# Altium PCB PCB.PcbDoc
Units mil, origin at the board's own origin, x right, y up, seen from the top; angles counter-clockwise.
Board outline 2490 x 1105 mil, 2 copper layers (Top Layer, Bottom Layer); 21 components, 27 nets, 98 pads, 1 vias.
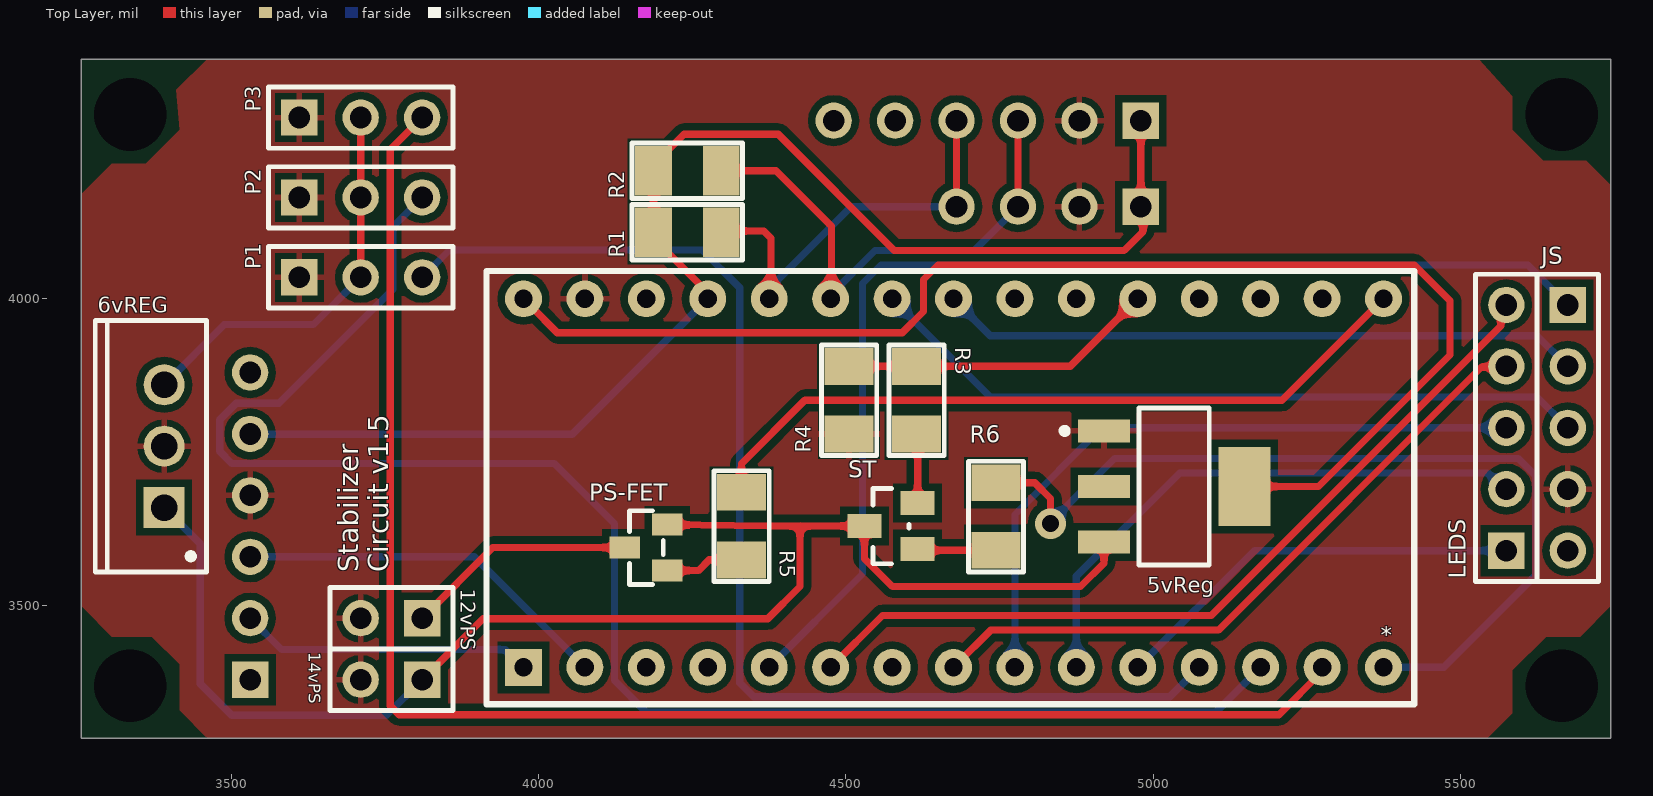
[diagram p0: Top Layer view]
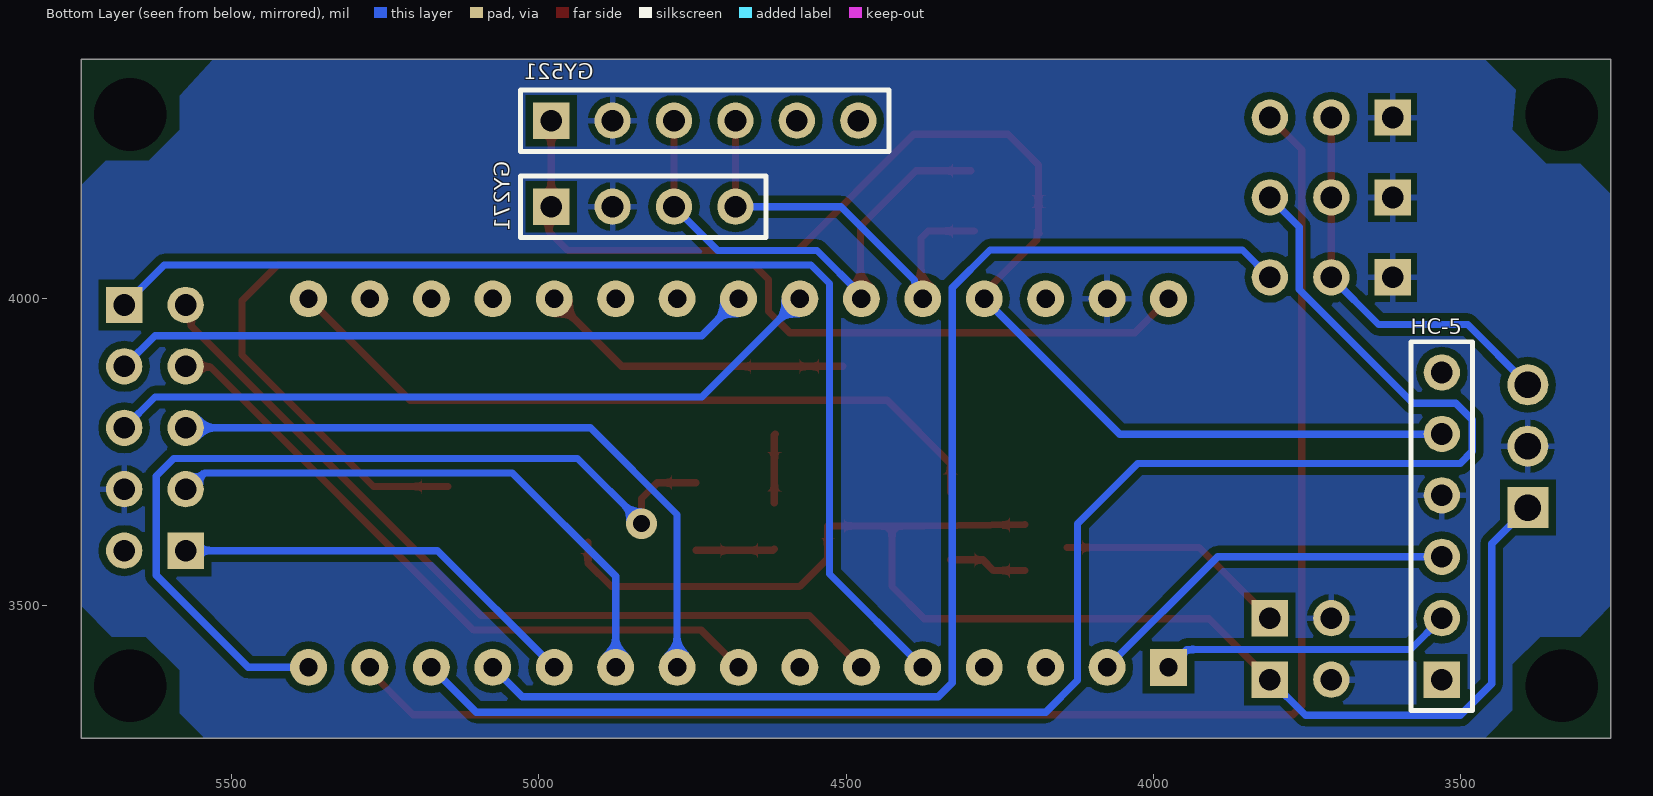
[diagram p1: Bottom Layer view, seen from below]

## Layer stack, top to bottom
Top Solder: solder mask 0.4, Solder Resist, Dk 3.5
Top Layer: signal copper 1.4
Dielectric 1: dielectric 12.6, FR-4, Dk 4.8
Bottom Layer: signal copper 1.4
Bottom Solder: solder mask 0.4, Solder Resist, Dk 3.5

## Board outline
3255,3285 5745,3285 5745,4390 3255,4390

## Design rules (kind name [scope] priority, off if disabled: settings)
Clearance [All] p1: gap=11.81 ignorepadtopadclearanceinfootprint=FALSE
ComponentClearance [All] p1: gap=0 collisioncheckmode=3 verticalgap=0 showdistances=FALSE
Height [All] p1: minheight=0 maxheight=1984.25 prefheight=500
HoleSize [All] p1: absolutevalues=TRUE maxlimit=118.11 minlimit=1 maxpercent=80.000 minpercent=20.000
PolygonConnect [All] p1: connectstyle=Relief reliefconductorwidth=10 reliefentries=4 polygonreliefangle="90 Angle" airgapwidth=10
RoutingVias [All] p1: holewidth=28 width=50 viastyle="Through Hole" minholewidth=28 minwidth=50 maxholewidth=28 maxwidth=50
SilkToSilkClearance [All] p1: silktosilkclearance=0
SilkToSolderMaskClearance [IsPad] p1: minsilkscreentomaskgap=0 clearancetoexposedcopper=TRUE
SolderMaskExpansion [All] p1: expansion=4.92 istentingtop=FALSE
UnRoutedNet [All] p1: checkbadconnections=TRUE
Width [All] p1: maxlimit=31.5 minlimit=11.81 preferedwidth=11.81
24 further rules are at their usual default settings.

## Components (designator, comment, footprint, x,y, rotation, side; value= is the part's Value field where it differs from the comment)
5vReg "LM1117MPX-3.3-NOPB" Texas_Instruments_LM1117MPX-3.3-NOPB_0 5034.17,3694.45 r270 top value=SKIP
6vREG "L7806ABV" TO220 3390,3760 r90 top
12vPS "Header 2" HDR1X2 3810,3480 r180 top
14vPS "Header 2" HDR1X2 3810,3380 r180 top
* "arduinoNano" "ARDUINO NANO" 3815,3340 r0 top
GY271 "Header 4" HDR1X4 4980,4150 r180 bottom
GY521 "Header 6" HDR1X6 4980,4290 r180 bottom
HC-5 "Header 6" HDR1X6 3530,3380 r90 bottom
JS "Header 5" HDR1X5 5675,3990 r270 top
LEDS "Header 5" HDR1X5 5575,3590 r90 top
P1 "Header 3" HDR1X3 3610,4035 r0 top
P2 "Header 3" HDR1X3 3610,4165 r0 top
P3 "Header 3" HDR1X3 3610,4295 r0 top
PS-FET "SI2301BDS-T1-E3" VISHAY_SILICONIX_S-03946_MFG 4175,3595 r180 top
R1 "1.87k" SMD-1206-RES 4241.81,4108.39 r270 top
R2 "1.87k" SMD-1206-RES 4241.81,4208.39 r270 top
R3 "1.62M" SMD-1206-RES 4615,3835 r180 top value=1.62k
R4 "732k" SMD-1206-RES 4505,3835 r0 top
R5 "100" SMD-1206-RES 4330,3630 r0 top
R6 "100" SMD-1206-RES 4744.09,3645.55 r0 top
ST "MMBT5551" ON_Semi_318BM_0 4573.31,3630 r90 top value=SKIP

## Footprints (in the part's own frame and the unit in brackets; to place one, negate y for a bottom-side part, rotate by r counter-clockwise, add the part's x,y. Pads: shape width x height; smd on the part's side, far side on the other; paste and mask are expansions set on the pad)
"ARDUINO NANO" [mil] "arduino nano"
  rect 60x60 hole 30: 0(160,60)
  round 60 hole 30: 1(260,60) 2(360,60) 3(460,60) 4(560,60) 5(660,60) 6(760,60) 7(860,60) 8(960,60) 9(1060,60) 10(1160,60) 11(1260,60) 12(1360,60) 13(1460,60) 14(1560,60) 15(1560,660) 16(1460,660) 17(1360,660) 18(1260,660) 19(1160,660) 20(1060,660) 21(960,660) 22(860,660) 23(760,660) 24(660,660) 25(560,660) 26(460,660) 27(360,660) 28(260,660) 29(160,660)
  silkscreen extent 100,0 1610,705
HDR1X2 [mm] "Connector; Header; 2 Position"
  rect 1.5x1.5 hole 0.9: 1(0,0)
  round 1.5 hole 0.9: 2(2.54,0)
  silkscreen extent -1.27,-1.27 3.81,1.27
HDR1X3 [mm] "Connector; Header; 3 Position"
  rect 1.5x1.5 hole 0.9: 1(0,0)
  round 1.5 hole 0.9: 2(2.54,0) 3(5.08,0)
  silkscreen extent -1.27,-1.27 6.35,1.27
HDR1X4 [mm] "Connector; Header; 4 Position"
  rect 1.5x1.5 hole 0.9: 1(0,0)
  round 1.5 hole 0.9: 2(2.54,0) 3(5.08,0) 4(7.62,0)
  silkscreen extent -1.27,-1.27 8.89,1.27
HDR1X5 [mm] "Connector; Header; 5 Position"
  rect 1.5x1.5 hole 0.9: 1(0,0)
  round 1.5 hole 0.9: 2(2.54,0) 3(5.08,0) 4(7.62,0) 5(10.16,0)
  silkscreen extent -1.27,-1.27 11.43,1.27
HDR1X6 [mm] "Connector; Header; 6 Position"
  rect 1.5x1.5 hole 0.9: 1(0,0)
  round 1.5 hole 0.9: 2(2.54,0) 3(5.08,0) 4(7.62,0) 5(10.16,0) 6(12.7,0)
  silkscreen extent -1.27,-1.27 13.97,1.27
ON_Semi_318BM_0 [mm]
  rect 1x1.4 smd paste+0 mask+0: 1(-0.95,-1.1) 2(0.95,-1.1) 3(0,1.1)
  silkscreen extent -1.56,-0.75 1.56,0.75, body extent -1.66,-1.9 1.66,1.9, height 0.25
SMD-1206-RES [mil]
  rect 80x60 smd: 1(0,55) 2(0,-55)
  silkscreen extent -45,-90 45,90, body extent -34,-66 34,66, height 33
Texas_Instruments_LM1117MPX-3.3-NOPB_0 [mm]
  rect 0.95x2.15 smd paste+0 mask+0: 1(-2.3,-2.9) 2(0,-2.9) 3(2.3,-2.9)
  rect 3.25x2.15 smd paste+0 mask+0: 4(0,2.9)
  silkscreen extent -3.25,-4.65 3.25,1.45, body extent -3.45,-4.08 3.45,4.08, height 0.25
TO220 [mm] "TO, Thru-Hole, Vertical, Heatsink Mounted; 3 In-Line Leads; Pitch 2.54 mm"
  rect 1.7x1.7 hole 1.1: 1(-2.54,0)
  round 1.7 hole 1.1: 2(0,0) 3(2.54,0)
  silkscreen extent -5.2,-1.75 5.2,2.85, body extent -5.25,-1.8 5.25,2.9, height 19.7
VISHAY_SILICONIX_S-03946_MFG [mil]
  rect 50x36 smd paste+0 mask+0: 1(-34,37.5) 2(-34,-37.5) 3(35,0)
  silkscreen extent -28,-60 28,60, body extent -65,-64 65,64, height 10

## Part data
5vReg: library part LM1117MPX-3.3/NOPB, "IC REG LINEAR 3.3V 800MA SOT223", Capacitance=SKIP, Digikey Part Number=LM1117MPX-3.3/NOPBCT-ND, Manufacturer="Texas Instruments", Mouser Part Number=926-LM1117MPX3.3NOPB, Package=SOT-223, Temperature="0°C to +125°C", Temperature Range High=+125°C, Temperature Range Low=0°C, ComponentLink1Description=Upverter, ComponentLink1URL=https://upverter.com/upn/revision/cd27f63952c6b59d/, ComponentLink2Description=Datasheet, ComponentLink2URL=http://www.ti.com/lit/ds/symlink/lm1117.pdf, Datasheet Path=datasheets/IC_Texas_Instruments_LM1117MPX-3.3-NOPB_eec.pdf, Datasheet Path1=datasheets/IC_Texas_Instruments_LM1117MPX-3.3-NOPB_eec.pdf, Digikey Description="IC REG LINEAR 3.3V 800MA SOT223", helpURL=https://upverter.com/upn/revision/cd27f63952c6b59d/, Inductance=SKIP, Lead Free=yes, Library Path1=parts/IC_Texas_Instruments_LM1117MPX-3.3-NOPB_eec.SchLib, Library Ref1=LM1117MPX-3.3-NOPB, Part Number=LM1117MPX-3.3/NOPB, Price=0.703616332073, Resistance=SKIP, RoHS=TRUE, Supplier 1=Digi-Key, Supplier 2=Mouser, Supplier Part Number 1=LM1117MPX-3.3/NOPBCT-ND, Supplier Part Number 2=926-LM1117MPX3.3NOPB, Voltage=SKIP
6vREG: "Positive Voltage Regulator, 6V, 3-Pin TO-220", ComponentLink1Description="Manufacturer URL", ComponentLink1URL=http://www.st.com, ComponentLink2Description=Datasheet, ComponentLink2URL=http://www.st.com/internet/com/TECHNICAL_RESOURCES/TECHNICAL_LITERATURE/DATASHEET/CD00000444.pdf, ComponentLink3Description="Package Specification", ComponentLink3URL=http://www.st.com/internet/com/TECHNICAL_RESOURCES/TECHNICAL_LITERATURE/PACKAGE_INFORMATION/CD00004649.pdf, DatasheetVersion=16/11/2011, PackageDescription="TO, Thru-Hole, Vertical, Heatsink Mounted; 3 In-Line Leads; Pitch 2.54 mm", PackageReference=TO220, PackageVersion=ver3.0, PartNumber=L7806ABV
12vPS 14vPS: "Header, 2-Pin", LatestRevisionDate=17-Jul-2002, LatestRevisionNote="Re-released for DXP Platform.", Publisher="Altium Limited"
GY271: "Header, 4-Pin", LatestRevisionDate=17-Jul-2002, LatestRevisionNote="Re-released for DXP Platform.", Publisher="Altium Limited"
GY521 HC-5: "Header, 6-Pin", LatestRevisionDate=17-Jul-2002, LatestRevisionNote="Re-released for DXP Platform.", Publisher="Altium Limited"
JS LEDS: "Header, 5-Pin", LatestRevisionDate=17-Jul-2002, LatestRevisionNote="Re-released for DXP Platform.", Publisher="Altium Limited"
P1 P2 P3: "Header, 3-Pin", LatestRevisionDate=17-Jul-2002, LatestRevisionNote="Re-released for DXP Platform.", Publisher="Altium Limited"
PS-FET: "TRANS MOSFET P-CH 20V 2.2A SOT23-3", Continuous Drain Current=-2.2A, Digikey Part Number=SI2301BDS-T1-E3CT-ND, Drain To Source Breakdown Voltage=-20V, Drain To Source Resistance=0.08Ω, Gate To Source Voltage=8V, Input Capacitace At Vds="375pF @ -6V", Manufacturer="Vishay Siliconix", Max Forward Diode Voltage=-1.2V, Max Junction Temp=+150°C, Mouser Part Number=781-SI2301BDS-E3, Package=S-03946, Power Dissipation=0.7W, Pulse Drain Current=-10A, Temperature="-55°C to +150°C", Temperature Range Low=-55°C, Typ Forward Diode Voltage=-0.8V, Automotive=No, ComponentLink1Description=Upverter, ComponentLink1URL=https://upverter.com/part/id/8ed443e4ece09bfe/, ComponentLink2Description=Datasheet, ComponentLink2URL=http://www.vishay.com/doc?72066, Datasheet Path=datasheets/Trans_Vishay_Siliconix_SI2301BDS-T1-E3_eec.pdf, Depletion Mode=False, Digikey Description="TRANS MOSFET P-CH 20V 2.2A SOT23-3", Drain To Source Voltage=-20V, Gate Charge At Vgs="4.5nC @ -4.5V", Height=1.12mm, helpURL=https://upverter.com/part/id/8ed443e4ece09bfe/, Ipc Land Pattern Name=SOT95P237X100-3, Lead Free=Yes, Mouser Description="MOSFET 20V 2.0A 0.9W", Number Of Channels=1, Number Of P Channels=1, Part Number=SI2301BDS-T1-E3, RoHS=TRUE, Rthja Max=140°C/W, Standoff Height=0.01mm, Supplier 1=Digi-Key, Supplier 2=Mouser, Supplier Part Number 1=SI2301BDS-T1-E3CT-ND, Supplier Part Number 2=781-SI2301BDS-E3, Temperature Range High=+150°C, Threshold Vgs Max=-0.95V, Threshold Vgs Min=-0.45V, Transconductance=6.5S, Turn Off Delay Time=30ns, Turn On Delay Time=20ns, Verification Version=0.0.0.3
R1 R2: library part ERJ-8ENF1871V, "RES SMD 1.87K OHM 1% 1/4W 1206", Digi-Key Part Number=P1.87KFCT-ND, Manufacturer="Panasonic Electronic Components", Operating Temperature="-55°C ~ 155°C", Package / Case="1206 (3216 Metric)", Power (Watts)="0.25W, 1/4W", Supplier Device Package=1206, Temperature Coefficient=±100ppm/°C, Tolerance=±1%, @ qty=1500, Composition="Thick Film", Datasheets=http://industrial.panasonic.com/www-cgi/jvcr13pz.cgi?E+PZ+3+AOA0002+ERJ8ENF1871V+7+WW, Factory Stock=0, Failure Rate=-, Features="Automotive AEC-Q200", Height - Seated (Max)="0.028\" (0.70mm)", Image=//media.digikey.com/Renders/Panasonic%20Renders/ERJ-1206%20Pkg.jpg, Minimum Quantity=1, Number of Terminations=2, Packaging="Cut Tape (CT)", Part Number=ERJ-8ENF1871V, Part Status=Active, Quantity Available=51643, Series=ERJ, Size / Dimension="0.126\" L x 0.063\" W (3.20mm x 1.60mm)", Unit Price (USD)=0.00933
R3: library part ERJ-8ENF1621V, "RES SMD 1.62K OHM 1% 1/4W 1206", Digi-Key Part Number=P1.62KFCT-ND, Manufacturer="Panasonic Electronic Components", Operating Temperature="-55°C ~ 155°C", Package / Case="1206 (3216 Metric)", Power (Watts)="0.25W, 1/4W", Supplier Device Package=1206, Temperature Coefficient=±100ppm/°C, Tolerance=±1%, @ qty=1500, Composition="Thick Film", Datasheets=http://industrial.panasonic.com/www-cgi/jvcr13pz.cgi?E+PZ+3+AOA0002+ERJ8ENF1621V+7+WW, Factory Stock=0, Failure Rate=-, Features="Automotive AEC-Q200", Height - Seated (Max)="0.028\" (0.70mm)", Image=//media.digikey.com/Renders/Panasonic%20Renders/ERJ-1206%20Pkg.jpg, Minimum Quantity=1, Number of Terminations=2, Packaging="Cut Tape (CT)", Part Number=ERJ-8ENF1621V, Part Status=Active, Quantity Available=55499, Series=ERJ, Size / Dimension="0.126\" L x 0.063\" W (3.20mm x 1.60mm)", Unit Price (USD)=0.00933
R4: library part ERJ-8ENF7323V, "RES SMD 732K OHM 1% 1/4W 1206", Digi-Key Part Number=P732KFCT-ND, Manufacturer="Panasonic Electronic Components", Operating Temperature="-55°C ~ 155°C", Package / Case="1206 (3216 Metric)", Power (Watts)="0.25W, 1/4W", Supplier Device Package=1206, Temperature Coefficient=±100ppm/°C, Tolerance=±1%, @ qty=1500, Composition="Thick Film", Datasheets=http://industrial.panasonic.com/www-cgi/jvcr13pz.cgi?E+PZ+3+AOA0002+ERJ8ENF7323V+7+WW, Factory Stock=0, Failure Rate=-, Features="Automotive AEC-Q200", Height - Seated (Max)="0.028\" (0.70mm)", Image=//media.digikey.com/Renders/Panasonic%20Renders/ERJ-1206%20Pkg.jpg, Minimum Quantity=1, Number of Terminations=2, Packaging="Cut Tape (CT)", Part Number=ERJ-8ENF7323V, Part Status=Active, Quantity Available=40849, Series=ERJ, Size / Dimension="0.126\" L x 0.063\" W (3.20mm x 1.60mm)", Unit Price (USD)=0.00933
R5 R6: library part ERJ-8ENF1000V, "RES SMD 100 OHM 1% 1/4W 1206", Digi-Key Part Number=P100FCT-ND, Manufacturer="Panasonic Electronic Components", Operating Temperature="-55°C ~ 155°C", Package / Case="1206 (3216 Metric)", Power (Watts)="0.25W, 1/4W", Supplier Device Package=1206, Temperature Coefficient=±100ppm/°C, Tolerance=±1%, @ qty=1500, Composition="Thick Film", Datasheets=http://industrial.panasonic.com/www-cgi/jvcr13pz.cgi?E+PZ+3+AOA0002+ERJ8ENF1000V+7+WW, Factory Stock=0, Failure Rate=-, Features="Automotive AEC-Q200", Height - Seated (Max)="0.028\" (0.70mm)", Image=//media.digikey.com/Renders/Panasonic%20Renders/ERJ-1206%20Pkg.jpg, Minimum Quantity=1, Number of Terminations=2, Packaging="Cut Tape (CT)", Part Number=ERJ-8ENF1000V, Part Status=Active, Quantity Available=384173, Series=ERJ, Size / Dimension="0.126\" L x 0.063\" W (3.20mm x 1.60mm)", Unit Price (USD)=0.00933
ST: "TRANS NPN 160V 0.6A SOT-23", Capacitance=SKIP, Collector Base Voltage=180V, Collector Emitter Breakdown Voltage=160V, Collector Emitter Saturation Voltage=0.2V, Digikey Part Number=MMBT5551FSCT-ND, Emitter Base Voltage=6V, Manufacturer="ON Semi", Max Collector Current=600mA, Max Junction Temp=+150°C, Mouser Part Number=512-MMBT5551, Package=318BM, Power Dissipation=350mW, Temperature=to, Collector Emitter Voltage=160V, ComponentLink1Description=Upverter, ComponentLink1URL=https://upverter.com/upn/revision/1e093772ae9a7220/, ComponentLink2Description=Datasheet, ComponentLink2URL=http://www.onsemi.com/pub/Collateral/2N5551-D.pdf, Datasheet Path=datasheets/Trans_ON_Semi_MMBT5551_eec.pdf, Datasheet Path1=datasheets/Trans_ON_Semi_MMBT5551_eec.pdf, Digikey Description="TRANS NPN 160V 0.6A SOT-23", Footprint Url=http://www.onsemi.com/pub/Collateral/318BM.PDF, Gain Bandwidth Product=100MHz, Height=1.2mm, helpURL=https://upverter.com/upn/revision/1e093772ae9a7220/, Hfe Min=80, Inductance=SKIP, Lead Free=yes, Library Path1=parts/Trans_ON_Semi_MMBT5551_eec.SchLib, Library Ref1=MMBT5551, Number Of Elements=1, Number Of Npn=1, Number Of Pnp=0, Part Number=MMBT5551, Price=SKIP, Resistance=SKIP, RoHS=TRUE, Standoff Height=0mm, Supplier 1=Digi-Key, Supplier 2=Mouser, Supplier Part Number 1=MMBT5551FSCT-ND, Supplier Part Number 2=512-MMBT5551, Verification Version=0.0.0.1, Voltage=SKIP

## Free pads (board coordinates)
  round 0 hole 118.11: 7(5665,3370) 8(5665,4300) 9(3335,4300) 10(3335,3370)

## Via types
v1: diameter 50, hole 28, Top Layer to Bottom Layer, 1 vias

## Nets (pads, with @x,y where several pads share a name; then routed paths per layer and width w, separated by ;. In a path a pad name is that pad's centre, name@x,y a point inside that pad or via, vN(x,y) a via of type N, cw(c..) or ccw(c..) an arc to the next point about the centre after c; other vN are vias at no path point)
GND: 5vReg.1 6vREG.2 12vPS.2 14vPS.2 *.28 GY271.2 GY521.2 HC-5.4 JS.4 P1.1 P2.1 P3.1 R4.2
Net5vReg_3: 5vReg.3 6vREG.1 14vPS.1 PS-FET.2 ST.3 | length 2327
  Top Layer w11.81: 14vPS.1 3909,3479 4372.7,3479 4425.2,3531.5 4425.2,3630 ; PS-FET.2 4372.5,3630 4425.2,3630 ; 5vReg.3 4920,3569.61 4881.89,3531.5 4575.5,3531.5 4530,3577 ST.3 4522.13,3630 4425.2,3630
  Bottom Layer w11.81: 6vREG.1 3448.82,3601.18 3448.82,3373.18 3500,3322 3752,3322 14vPS.1
Net5vReg_4: 5vReg.4 *.29 | length 2129.4
  Top Layer w11.81: *.29@3984.25,3988.19 3986.81,3988.19 4030.12,3944.88 4591.51,3944.88 4625.98,3979.36 4625.98,4031.5 4649.61,4055.12 5425.2,4055.12 5483.3,3997.02 5483.3,3908.49 5269.25,3694.45 5vReg.4
Net6vREG_3: 6vREG.3 P1.2 P2.2 P3.2 | length 652.5
  Top Layer w11.81: P1.2 P2.2 P3.2
  Bottom Layer w11.81: 6vREG.3 3488,3958 3633,3958 P1.2
Net12vPS_1: 12vPS.1 PS-FET.3 | length 377.6
  Top Layer w11.81: 12vPS.1 3925,3595 PS-FET.3
Net*_4: *.4 JS.1 | length 1875.4
  Bottom Layer w11.81: *.4 4527,3552 4527,4025 4557.12,4055.12 5609.88,4055.12 JS.1
Net*_5: *.5 LEDS.5 | length 1359.2
  Top Layer w11.81: *.5 4559.25,3484.25 5094.49,3484.25 5566.02,3955.79 5566.02,3981.02 LEDS.5
Net*_7: *.7 LEDS.4 | length 1098.5
  Top Layer w11.81: *.7@4677.17,3405.51 4680.51,3405.51 4735.63,3460.63 5106.3,3460.63 5534.67,3889.01 5574.01,3889.01 LEDS.4
Net*_8: *.8 LEDS.3 | length 1107.4
  Bottom Layer w11.81: *.8 4775,3649.02 4915.98,3790 LEDS.3
Net*_9: *.9 LEDS.2 | length 928.9
  Bottom Layer w11.81: *.9 4875,3548.23 5043.31,3716.54 5544.51,3716.54 5571.04,3690 LEDS.2
Net*_10: *.10 LEDS.1 | length 678.7
  Bottom Layer w11.81: *.10 5165,3590 LEDS.1
Net*_11: *.11 P1.3 | length 1981.2
  Bottom Layer w11.81: P1.3 3854.41,4079.41 4265.59,4079.41 4327,4018 4327,3375 4350,3352 5027,3352 *.11
Net*_12: *.12 P2.3 | length 2641
  Bottom Layer w11.81: P2.3 3762,4117 3762,4015 3577,3830 3507.17,3830 3480.32,3803.15 3480.32,3751.68 3500,3732 4025,3732 4123,3634 4123,3379 4175,3327 5102,3327 *.12
Net*_13: *.13 P3.3 | length 2538
  Top Layer w11.81: P3.3 3758,4243 3758,3337.5 3772.5,3323 5204.89,3323 5275,3393.11 *.13
Net*_14: *.14 R6.1 | length 1459.3
  Top Layer w11.81: R6.1 4807.45,3700.55 4833,3675 v1(4833,3634)
  Bottom Layer w11.81: v1(4833,3634) 4833,3636.15 4937.01,3740.16 5594.49,3740.16 5623,3711.65 5623,3550 5473,3400 *.14
Net*_15: *.15 R5.1 | length 1200.1
  Top Layer w11.81: R5.1 4330,3731.57 4433.07,3834.65 5209.65,3834.65 5371.06,3996.06 *.15@5374.02,3996.06
Net*_19: *.19 R3.2 R4.1 | length 515.6
  Top Layer w11.81: R4.1 R3.2 4865,3890 *.19
Net*_22: *.22 JS.2 | length 1045.6
  Bottom Layer w11.81: *.22 4735,3940 5625,3940 JS.2
Net*_23: *.23 JS.3 | length 1187
  Bottom Layer w11.81: *.23 4735,3840 5625,3840 JS.3
NetPS-FET_1: PS-FET.1 R5.2 | length 128.2
  Top Layer w11.81: PS-FET.1 4260,3557.5 4277.5,3575 R5.2
NetR3_1: R3.1 ST.2 | length 113.3
  Top Layer w11.81: R3.1 4616.61,3778.39 ST.2
NetR6_2: R6.2 ST.1 | length 128.3
  Top Layer w11.81: ST.1 4618.66,3590.55 R6.2
RXD: *.0 HC-5.2 | length 478.1
  Bottom Layer w11.81: HC-5.2 3580.87,3429.13 3945.87,3429.13 *.0
scl: *.24 GY271.3 GY521.3 R2.1 | length 838.1
  Top Layer w11.81: R2.1 4386.1,4208.38 4476.38,4118.11 *.24@4476.38,4007.87 ; GY271.3 GY521.3
  Bottom Layer w11.81: *.24 4475,4006.5 4547.24,4078.74 4708.74,4078.74 GY271.3
sda: *.25 GY271.4 GY521.4 R1.1 | length 708.1
  Top Layer w11.81: R1.1@4291.34,4110.24 4366.14,4110.24 4377.95,4098.43 4377.95,4002.95 *.25 ; GY271.4 GY521.4
  Bottom Layer w11.81: *.25 4375,4013.04 4388.56,4026.6 4388.56,4030.3 4508.27,4150 GY271.4
TXD: *.1 HC-5.3 | length 619.6
  Bottom Layer w11.81: HC-5.3 3895,3580 *.1
VCC: *.26 GY271.1 GY521.1 HC-5.5 JS.5 R1.2 R2.2 | length 2185.5
  Top Layer w11.81: R1.2@4185.04,4106.3 4186.81,4108.07 R1.2 4186.81,4218.38 4210.91,4242.48 4210.98,4242.48 4236.22,4267.72 4389.76,4267.72 4578.74,4078.74 4952.76,4078.74 4983.69,4109.67 4983.69,4146.31 GY271.1 GY521.1 ; R1.2@4188.98,4110.24 4188.98,4096.22 4275,4010.2 *.26
  Bottom Layer w11.81: HC-5.5 3530.47,3779.53 4054.53,3779.53 *.26
pads on no net: 5vReg.2 *.2 *.3 *.6 *.16 *.17 *.18 *.20 *.21 *.27 GY521.5 GY521.6 HC-5.1 HC-5.6

## Polygon pours and split planes (outlines as drawn)
GND on Bottom Layer "GND_L02_P003" (solid, remove dead copper, pour order 3): 3255,4390 5745,4390 5745,3285 3255,3285
GND on Top Layer "GND_L01_P006" (solid, remove dead copper, pour order 6): 3255,4390 3255,3285 5720,3285 5745,3310 5745,4390

## Other copper
Top Layer:
  pour cut-out: 5745,4225 5745,4185 5705,4225 5635,4225 5585,4275 5585,4330 5530,4390 5570,4390 5745,4390
  pour cut-out: 3255,3470 3255,3500 3305,3450 3370,3450 3415,3405 3415,3330 3460,3285 3425,3285 3255,3285
  pour cut-out: 5580,3285 5545,3285 5585,3325 5585,3395 5640,3450 5695,3450 5745,3500 5745,3465 5745,3285
  pour cut-out: 3430,4390 3460,4390 3410,4340 3415,4275 3360,4220 3305,4220 3255,4170 3255,4225 3255,4390
Bottom Layer:
  pour cut-out: 3255,3465 3255,3501.25 3305,3450 3370,3450 3415,3405 3415,3330 3460,3285 3435,3285 3255,3285
  pour cut-out: 5595,3285 5545,3285 5585,3325 5585,3395 5640,3450 5695,3450 5745,3500 5745,3465 5745,3285
  pour cut-out: 3427.5,4390 3460,4390 3410,4340 3415,4275 3360,4220 3305,4220 3255,4170 3255,4390
  pour cut-out: 5745,4250 5745,4185 5705,4225 5635,4225 5585,4275 5585,4330.22 5530,4390 5595,4390 5745,4390

## Silkscreen, mask and mechanical layers (free items; w line width, h text height)
Top Overlay:
  text "Stabilizer / Circuit v1.5" at 3755,3555 h32.44 r90

## Dimensions
3335,4300 to 5665,4300 on Top Paste
3335,4300 to 3335,3370 on Top Paste
3255,4390 to 5745,4390 on Top Paste
3255,4390 to 3255,3285 on Top Paste